# Altium PCB NanoBoard.PcbDoc
Units mil, origin at the board's own origin, x right, y up, seen from the top; angles counter-clockwise.
Board outline 2090 x 3460 mil, 2 copper layers (Top Layer, Bottom Layer); 9 components, 10 nets, 56 pads, 0 vias.
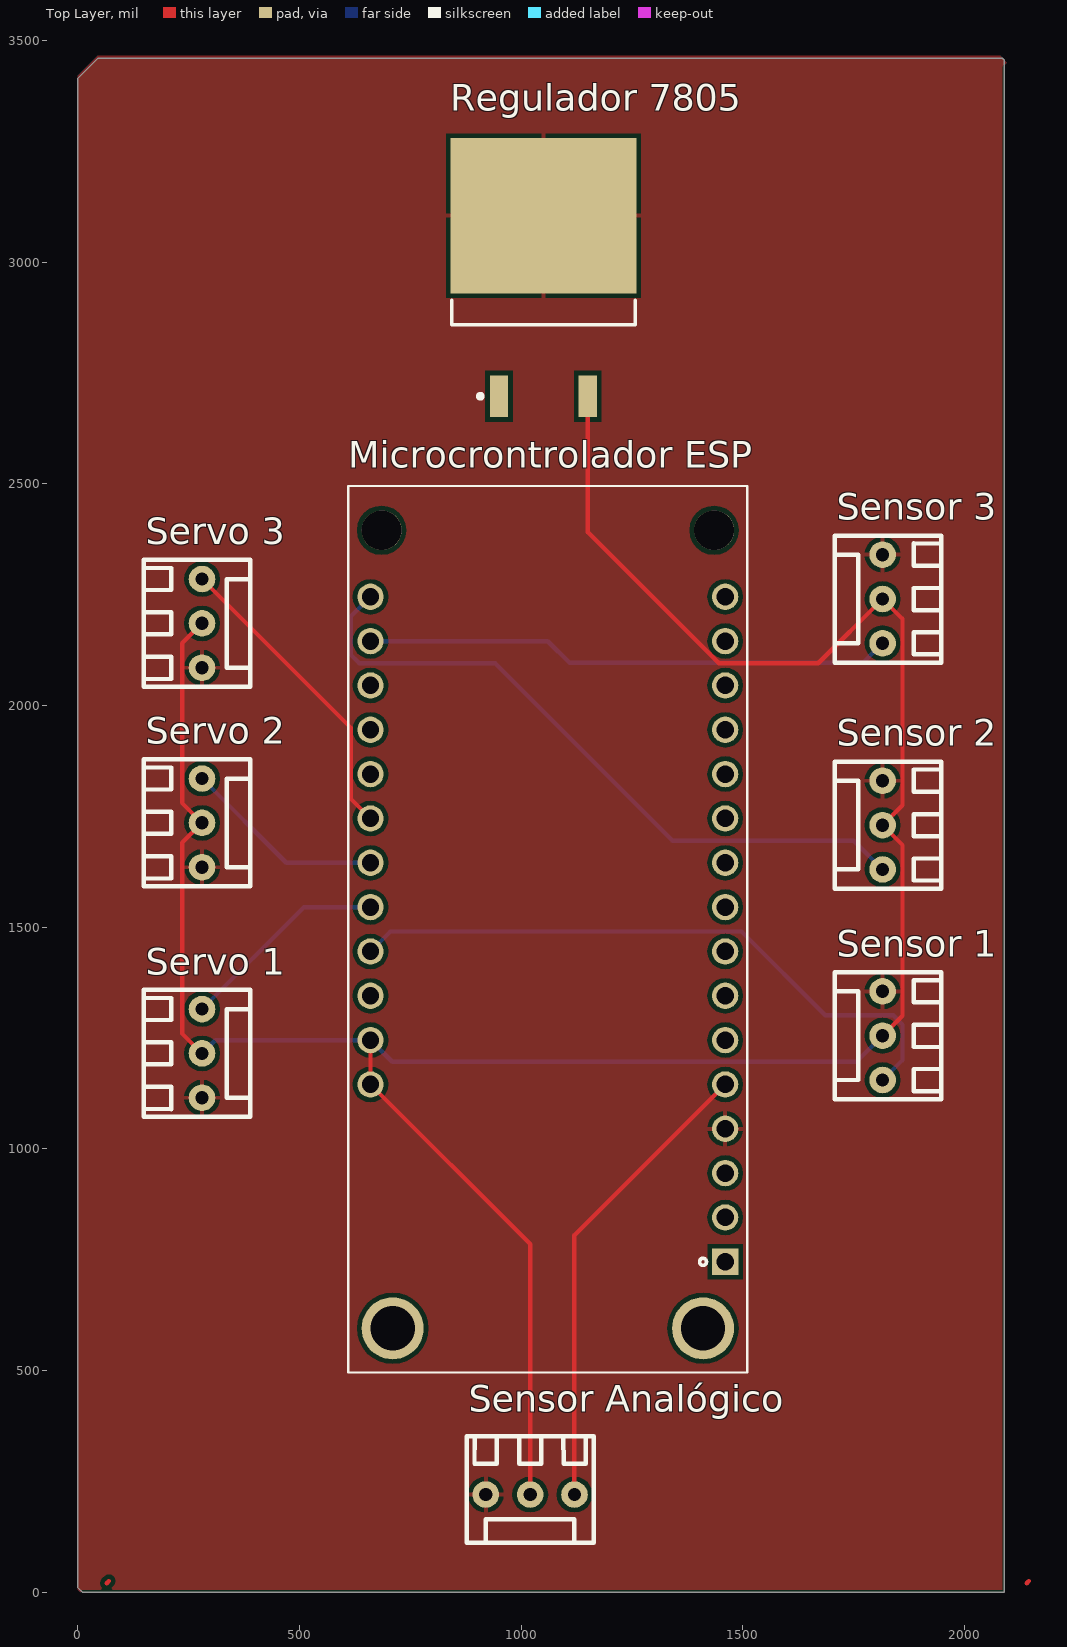
[diagram p0: Top Layer view]
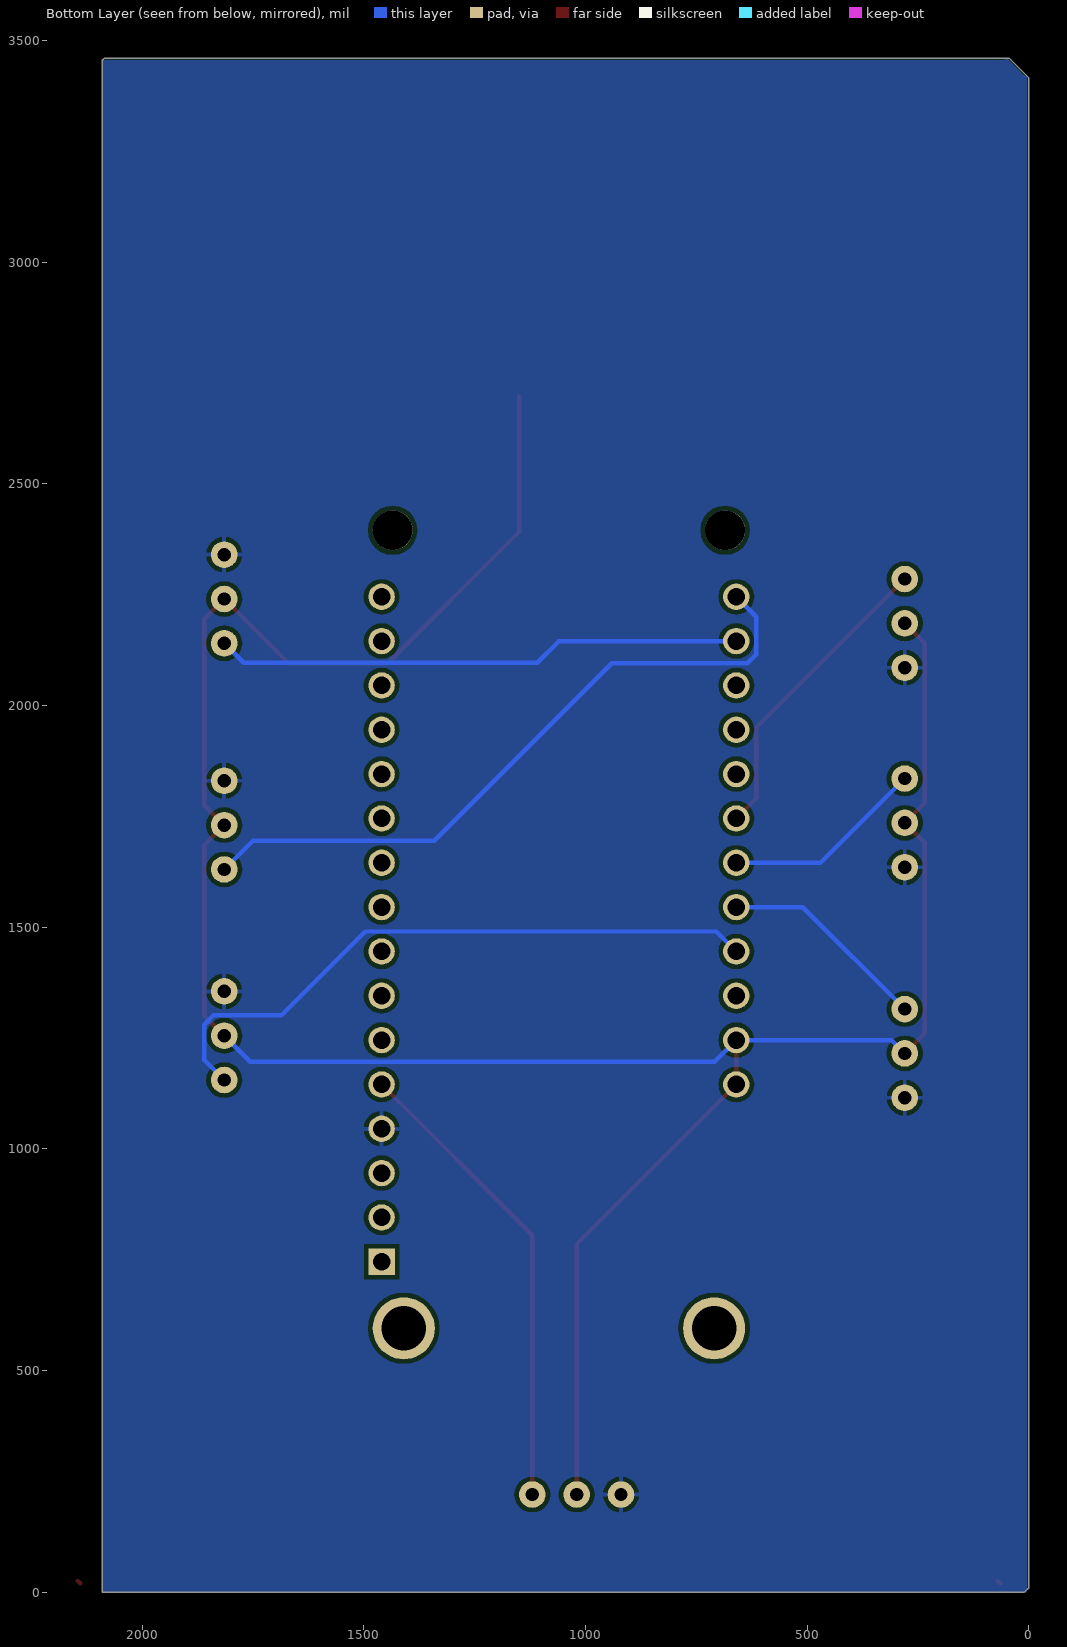
[diagram p1: Bottom Layer view, seen from below]
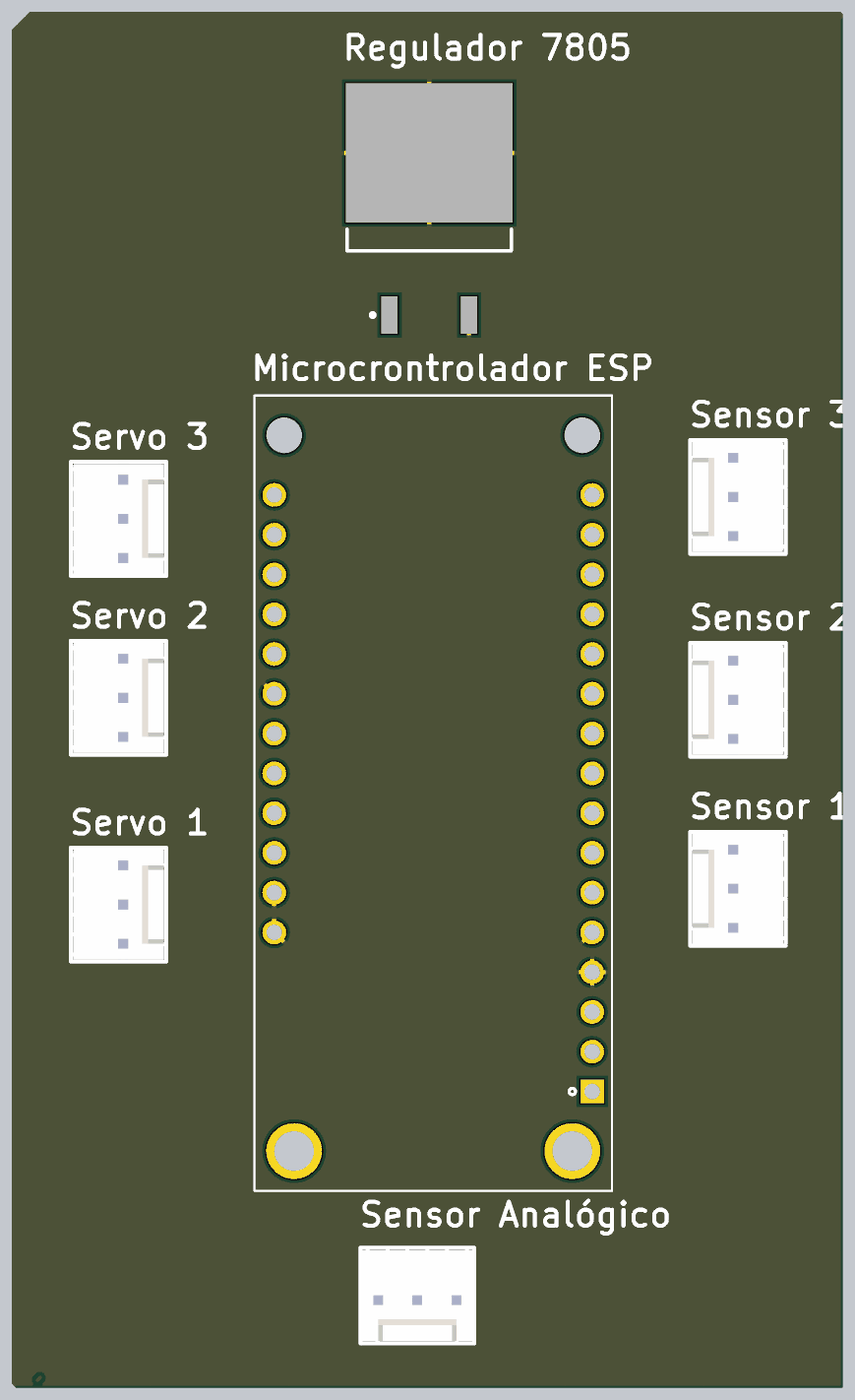
[diagram p2: 3D render of the assembled board from above, using the file's embedded part models]

## Layer stack, top to bottom
Top Solder: solder mask 0.4, Solder Resist, Dk 3.5
Top Layer: signal copper 1.4
Dielectric 1: dielectric 12.6, FR-4, Dk 4.8
Bottom Layer: signal copper 1.4
Bottom Solder: solder mask 0.4, Solder Resist, Dk 3.5

## Board outline
10,0 0,10 0,3415 45,3460 2085,3460 2090,3455 2090,0

## Design rules (kind name [scope] priority, off if disabled: settings)
Clearance [All] p1: gap=10 ignorepadtopadclearanceinfootprint=FALSE except(0: Arc-Hole Track-Hole SMDPad-Hole THPad-Hole Via-Hole Fill-Hole Poly-Hole Region-Hole Text-Hole)
PolygonConnect [All] p1: connectstyle=Relief reliefconductorwidth=10 reliefentries=4 polygonreliefangle="90 Angle" airgapwidth=10
RoutingVias [All] p1: holewidth=28 width=50 viastyle="Through Hole" minholewidth=28 minwidth=50 maxholewidth=28 maxwidth=50
SolderMaskExpansion [All] p1: expansion=4 istentingtop=FALSE
Width [All] p1: maxlimit=10 minlimit=10 preferedwidth=10
30 further rules are at their usual default settings.

## Components (designator, comment, footprint, x,y, rotation, side; value= is the part's Value field where it differs from the comment)
"Microcrontrolador ESP" "ESP8266" XCVR_ESP8266 1060,1495 r90 top
"Regulador 7805" "Volt Reg" D2PAK_N 1050,2965 r90 top
"Sensor 1" "KK3" KK3 1815,1155 r90 top
"Sensor 2" "KK3" KK3 1815,1630 r90 top
"Sensor 3" "KK3" KK3 1815,2140 r90 top
"Sensor Analógico" "KK3" KK3 1120,220 r180 top
"Servo 1" "KK3" KK3 280,1315 r270 top
"Servo 2" "KK3" KK3 280,1835 r270 top
"Servo 3" "KK3" KK3 280,2285 r270 top

## Footprints (in the part's own frame and the unit in brackets; to place one, negate y for a bottom-side part, rotate by r counter-clockwise, add the part's x,y. Pads: shape width x height; smd on the part's side, far side on the other; paste and mask are expansions set on the pad)
D2PAK_N [mm] "D2-PAK, 4-Leads, Body 8.8x10.4mm, Pitch 2.54mm, Lead Span 15.1mm, IPC Medium Density"
  rect 2.4x1.05 smd: 1(-6.8,2.54) 3(-6.8,-2.54)
  rect 8.9x10.65 smd: 2(3.55,0)
  silkscreen extent -6.92,-5.25 -1.3,5.25, body extent -2.7,-5.28 6.3,5.28, height 4.69
KK3 [mil] "KK connector, 3 ways"
  round 60 hole 30: 1(0,0) 2(100,0) 3(200,0)
  silkscreen extent -43,-132 243,108, body extent -38,-126 238,102, height 463
XCVR_ESP8266 [mm]
  rect 1.508x1.508 / inner round 1.508 / far side rect 1.508x1.508 hole 1: 1(-19.05,-10.16)
  round 1.508 hole 1: 2(-16.51,-10.16) 3(-13.97,-10.16) 4(-11.43,-10.16) 5(-8.89,-10.16) 6(-6.35,-10.16) 7(-3.81,-10.16) 8(-1.27,-10.16) 9(1.27,-10.16) 10(3.81,-10.16) 11(6.35,-10.16) 12(8.89,-10.16) 13(11.43,-10.16) 14(13.97,-10.16) 15(16.51,-10.16) 16(19.05,-10.16) 17(-8.89,10.16) 18(-6.35,10.16) 19(-3.81,10.16) 20(-1.27,10.16) 21(1.27,10.16) 22(3.81,10.16) 23(6.35,10.16) 24(8.89,10.16) 25(11.43,10.16) 26(13.97,10.16) 27(16.51,10.16) 28(19.05,10.16)
  round 3.556 hole 2.54: S1(-22.86,-8.89) S2(-22.86,8.89)
  round 2.286 hole 2.286 unplated: ""(22.86,-9.525) ""(22.86,9.525)
  silkscreen extent -25.4,-11.43 25.4,11.43

## Part data
"Microcrontrolador ESP": "ESP8266, ESP-WROOM-02U series Transceiver; 802.11 b/g/n (Wi-Fi, WiFi, WLAN) Evaluation Board", Package=None, Availability="In Stock", Check_prices=https://www.snapeda.com/parts/ESP8266/Espressif+Systems/view-part/?ref=eda, MF="Espressif Systems", MP=ESP8266, Price=None, Purchase-URL=https://pricing.snapeda.com/search/part/ESP8266/?ref=eda, SnapEDA_Link=https://www.snapeda.com/parts/ESP8266/Espressif+Systems/view-part/?ref=snap
"Regulador 7805": "Voltage Regulator", LatestRevisionDate=29-May-2009, LatestRevisionNote="IPC-7351 Footprint Added.", PackageDescription="3-Pin Transistor Outline Package 2.54 mm Pitch, 15.1 mm Lead Span", PackageReference=D2PAK, Published=24-Mar-1999, Publisher="Altium Limited"
"Sensor 1" "Sensor 2" "Sensor 3" "Sensor Analógico" "Servo 1" "Servo 2" "Servo 3": "KK Connector, 3 ways"

## Nets (pads, with @x,y where several pads share a name; then routed paths per layer and width w, separated by ;. In a path a pad name is that pad's centre, name@x,y a point inside that pad or via, vN(x,y) a via of type N, cw(c..) or ccw(c..) an arc to the next point about the centre after c; other vN are vias at no path point)
GND: "Microcrontrolador ESP.4" "Regulador 7805.2" "Sensor 1.3" "Sensor 2.3" "Sensor 3.3" "Sensor Analógico.3" "Servo 1.3" "Servo 2.3" "Servo 3.3"
"SENS 1": "Microcrontrolador ESP.20" "Sensor 1.1" | length 1449.3
  Bottom Layer w10: 660,1445 705,1490 1497,1490 1686,1301 1839,1301 1860,1280 1860,1200 1815,1155
"SENS 2": "Microcrontrolador ESP.28" "Sensor 2.1" | length 1549.5
  Bottom Layer w10: 660,2245 615,2200 615,2115 635,2095 941,2095 1341,1695 1750,1695 1815,1630
"SENS 3": "Microcrontrolador ESP.27" "Sensor 3.1" | length 1193.5
  Bottom Layer w10: 660,2145 1060,2145 1109,2096 1771,2096 1815,2140
SENSA: "Microcrontrolador ESP.5" "Sensor Analógico.1" | length 1065.8
  Top Layer w10: 1120,220 1120,805 1460,1145
"SERVO 1": "Microcrontrolador ESP.21" "Servo 1.1" | length 475.3
  Bottom Layer w10: 280,1315 510,1545 660,1545
"SERVO 2": "Microcrontrolador ESP.22" "Servo 2.1" | length 458.7
  Bottom Layer w10: 280,1835 470,1645 660,1645
"SERVO 3": "Microcrontrolador ESP.23" "Servo 3.1" | length 697.4
  Top Layer w10: 280,2285 615,1950 615,1790 660,1745
VBAT: "Regulador 7805.1"
VREG: "Microcrontrolador ESP.17" "Microcrontrolador ESP.18" "Regulador 7805.3" "Sensor 1.2" "Sensor 2.2" "Sensor 3.2" "Sensor Analógico.2" "Servo 1.2" "Servo 2.2" "Servo 3.2" | length 6024.3
  Top Layer w10: 280,1215 235,1260 235,1690 280,1735 235,1780 235,2140 280,2185 ; 660,1245 660,1145 1020,785 1020,220 ; 1150,2697.28 1150,2391 1446,2095 1670,2095 1815,2240 1860,2195 1860,1775 1815,1730 1860,1685 1860,1300 1815,1255
  Bottom Layer w10: 280,1215 310,1245 660,1245 709,1196 1756,1196 1815,1255
pads on no net: "Microcrontrolador ESP.1" "Microcrontrolador ESP.2" "Microcrontrolador ESP.3" "Microcrontrolador ESP.6" "Microcrontrolador ESP.7" "Microcrontrolador ESP.8" "Microcrontrolador ESP.9" "Microcrontrolador ESP.10" "Microcrontrolador ESP.11" "Microcrontrolador ESP.12" "Microcrontrolador ESP.13" "Microcrontrolador ESP.14" "Microcrontrolador ESP.15" "Microcrontrolador ESP.16" "Microcrontrolador ESP.19" "Microcrontrolador ESP.24" "Microcrontrolador ESP.25" "Microcrontrolador ESP.26" "Microcrontrolador ESP." "Microcrontrolador ESP.S1" "Microcrontrolador ESP.S2"
copper on no net: | length 14.1
  Top Layer w10: 65,20 70,25 ; 2140,20 2145,25

## Polygon pours and split planes (outlines as drawn)
GND on Top Layer "GND_L01_P000" (solid, pour order 0): 45,3465 2080,3465 2095,3450 2085,3440 2085,5 10,5 5,0 0,5 0,3420
GND on Bottom Layer "GND_L02_P001" (solid, pour order 1): 10,3420 50,3460 55,3455 2090,3455 2090,0 5,0 5,3420

## Silkscreen, mask and mechanical layers (free items; w line width, h text height)
Mechanical 1:
  the board outline again, w10